# Altium PCB 0.2.PcbDoc
Units mil, origin at the board's own origin, x right, y up, seen from the top; angles counter-clockwise.
Board outline 6000 x 4000 mil, 2 copper layers (Top Layer, Bottom Layer); 14 components, 9 nets, 84 pads, 0 vias.
Unrouted connection lines stored in the file: 14.
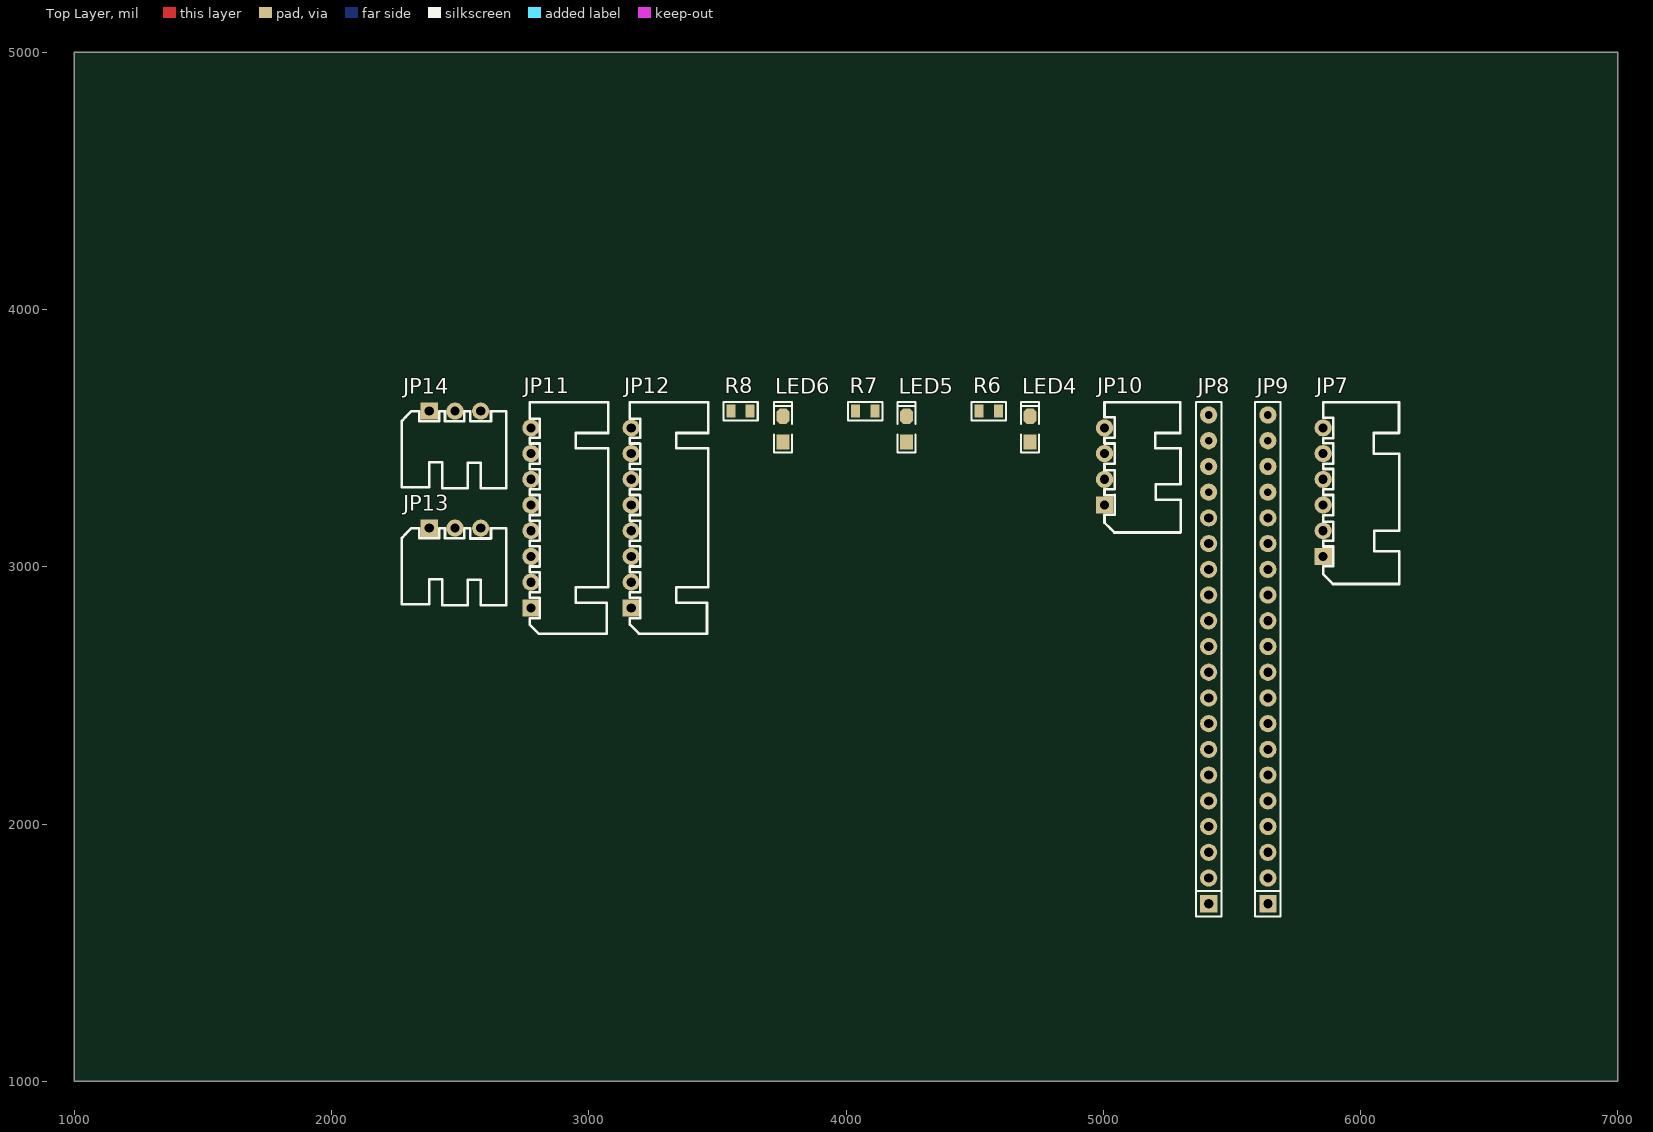
[diagram p0: Top Layer view]
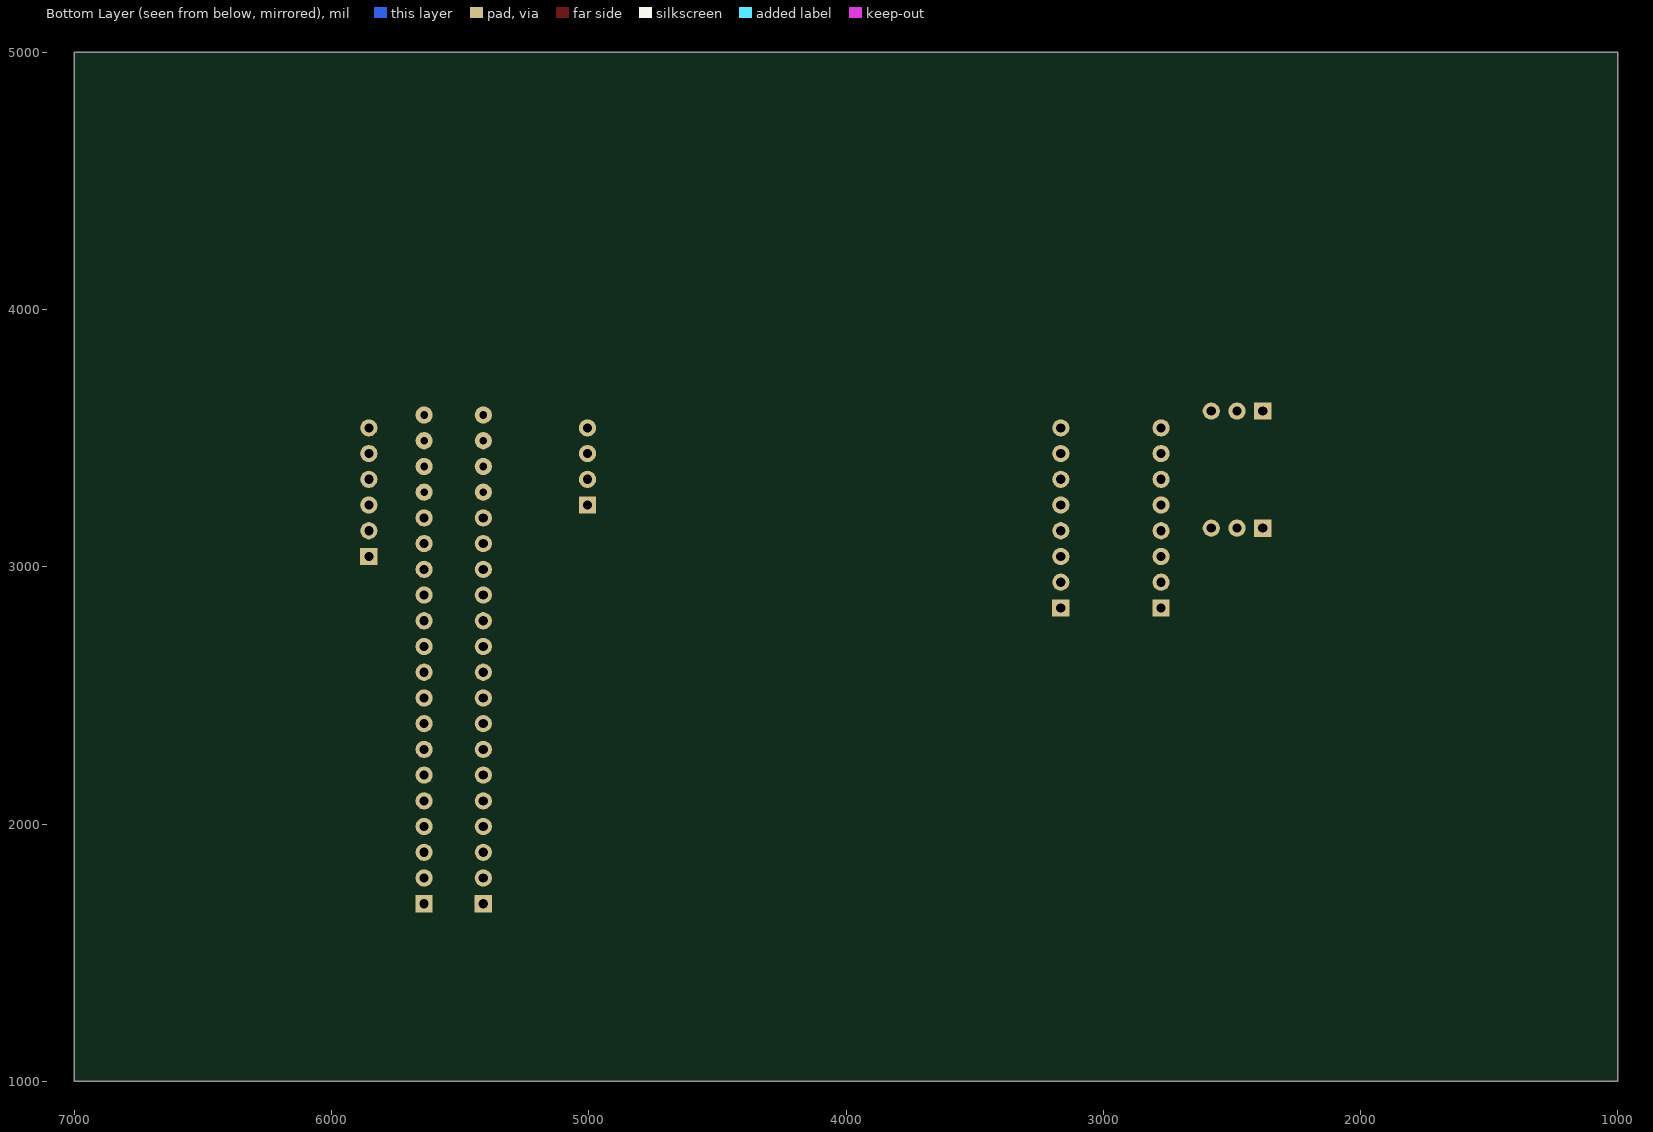
[diagram p1: Bottom Layer view, seen from below]

## Layer stack, top to bottom
Top Solder: solder mask 0.4, Solder Resist, Dk 3.5
Top Layer: signal copper 1.4
Dielectric 1: dielectric 12.6, FR-4, Dk 4.8
Bottom Layer: signal copper 1.4
Bottom Solder: solder mask 0.4, Solder Resist, Dk 3.5

## Board outline
1000,1000 7000,1000 7000,5000 1000,5000

## Design rules (kind name [scope] priority, off if disabled: settings)
Clearance [All] p1: gap=10 ignorepadtopadclearanceinfootprint=FALSE except(0: Arc-Hole Track-Hole SMDPad-Hole THPad-Hole Via-Hole Fill-Hole Poly-Hole Region-Hole Text-Hole)
PolygonConnect [All] p1: connectstyle=Relief reliefconductorwidth=10 reliefentries=4 polygonreliefangle="90 Angle" airgapwidth=10
RoomDefinition 0.2 [InComponentClass('0.2')] p1: confinementstyle=ConfineIn formatcopy=TRUE lockcomponents=FALSE outline 1795,1630 6165,1630 6165,3750 1795,3750
RoutingVias [All] p1: holewidth=28 width=50 viastyle="Through Hole" minholewidth=28 minwidth=50 maxholewidth=28 maxwidth=50
SolderMaskExpansion [All] p1: expansion=4 istentingtop=FALSE
Width [All] p1: maxlimit=10 minlimit=10 preferedwidth=10
30 further rules are at their usual default settings.

## Components (designator, comment, footprint, x,y, rotation, side; value= is the part's Value field where it differs from the comment)
JP7 "HDR-1X6" XH2.54-WI-6P 5855,3290 r90 top
JP8 "HDR-1X20" HDR2.54-LI-20P 5410,2640 r90 top
JP9 "HDR-1X20" HDR2.54-LI-20P 5640,2640 r90 top
JP10 "HDR-1X4" XH2.54-WI-4P 5005,3390 r90 top
JP11 "HDR-1X8" XH2.54-WI-8P 2775,3190 r90 top
JP12 "HDR-1X8" XH2.54-WI-8P 3165,3190 r90 top
JP13 "HDR-1X3" XH2.54-WI-3P 2480,3150 r0 top
JP14 "HDR-1X3" XH2.54-WI-3P 2480,3605 r0 top
LED4 "绿色" "LED 0805G" 4715,3535 r90 top
LED5 "红色" "LED 0805G" 4235,3535 r90 top
LED6 "红色" "LED 0805G" 3755,3535 r90 top
R6 "500K" "R 0805_L" 4555,3605 r0 top
R7 "500K" "R 0805_L" 4075,3605 r0 top
R8 "500K" "R 0805_L" 3590,3605 r0 top

## Footprints (in the part's own frame and the unit in brackets; to place one, negate y for a bottom-side part, rotate by r counter-clockwise, add the part's x,y. Pads: shape width x height; smd on the part's side, far side on the other; paste and mask are expansions set on the pad)
HDR2.54-LI-20P [mm] "排针，20脚"
  rect 1.7x1.7 hole 0.9: 1(-24.13,0)
  round 1.7 hole 0.9: 2(-21.59,0) 3(-19.05,0) 4(-16.51,0) 5(-13.97,0) 6(-11.43,0) 7(-8.89,0) 8(-6.35,0) 9(-3.81,0) 10(-1.27,0) 11(1.27,0) 12(3.81,0) 13(6.35,0) 14(8.89,0) 15(11.43,0) 16(13.97,0)
  round 1.7 hole 0.762: 17(16.51,0) 18(19.05,0) 19(21.59,0) 20(24.13,0)
  silkscreen extent -25.4,-1.27 25.4,1.27, body extent -25.4,-1.27 25.4,1.27, height 8.5
"LED 0805G" [mil] "绿色0805LED"
  rect 60x50 smd: 1(-50,0)
  oct 60x50 smd: 2(50,0)
  silkscreen extent -90,-35 105,35, body extent -39,-25 39,25, height 32
"R 0805_L" [mil] "1/8W贴片电阻"
  rect 35x50 smd: 1(-37.4,0) 2(37.4,0)
  silkscreen extent -67,-36 67,36, body extent -39,-25 39,25, height 20
XH2.54-WI-3P [mm] "接插件，3P"
  rect 1.7x1.7 hole 0.9: 1(-2.54,0)
  round 1.7 hole 0.9: 2(0,0) 3(2.54,0)
  silkscreen extent -5.26,-7.62 5.08,0, body extent -5.04,-7.35 5.04,0.35, height 5.73
XH2.54-WI-4P [mm] "接插件，4P"
  rect 1.7x1.7 hole 0.9: 1(-3.81,0)
  round 1.7 hole 0.9: 2(-1.27,0) 3(1.27,0) 4(3.81,0)
  silkscreen extent -6.53,-7.53 6.35,0, body extent -6.31,-7.35 6.31,0.35, height 5.73
XH2.54-WI-6P [mm] "接插件，6P"
  rect 1.7x1.7 hole 0.9: 1(-6.35,0)
  round 1.7 hole 0.9: 2(-3.81,0) 3(-1.27,0) 4(1.27,0) 5(3.81,0) 6(6.35,0)
  silkscreen extent -9.07,-7.53 8.89,0, body extent -8.85,-7.35 8.85,0.35, height 5.75
XH2.54-WI-8P [mm] "接插件，8P"
  rect 1.7x1.7 hole 0.9: 1(-8.89,0)
  round 1.7 hole 0.9: 2(-6.35,0) 3(-3.81,0) 4(-1.27,0) 5(1.27,0) 6(3.81,0) 7(6.35,0) 8(8.89,0)
  silkscreen extent -11.43,-7.62 11.43,0.13, body extent -11.39,-7.35 11.39,0.35, height 5.75

## Part data
JP7: library part "Header 6", "6P接插件", BOM名称=HB-03, 学习资源=https://shop463601444.taobao.com, 版权归属="封装库来自淘宝 ID：黄晶宝石"
JP8 JP9: library part "Header 20", "20P接插件", 学习资源=https://shop463601444.taobao.com, 版权归属="封装库来自淘宝 ID：黄晶宝石"
  JP8: BOM名称=stm32-1
  JP9: BOM名称=stm32-2
JP10: library part "Header 4", "4P接插件", BOM名称=USB-C, 学习资源=https://shop463601444.taobao.com, 版权归属="封装库来自淘宝 ID：黄晶宝石"
JP11 JP12: library part "Header 8", "8P接插件", 学习资源=https://shop463601444.taobao.com, 版权归属="封装库来自淘宝 ID：黄晶宝石"
  JP11: BOM名称=TB6612接插件1
  JP12: BOM名称=TB6612接插件2
JP13 JP14: library part "Header 3", "3P接插件", BOM名称=3P接插件, 学习资源=https://shop463601444.taobao.com, 版权归属="封装库来自淘宝 ID：黄晶宝石"
LED4 LED5 LED6: library part LED-SMD, "贴片LED", 学习资源=www.ooocke.com, 版权归属=源创客
  LED4: BOM名称=电源指示
  LED5 LED6: BOM名称=贴片LED
R6 R7 R8: library part R, "贴片电阻", BOM名称=贴片电阻, 版权归属="来自淘宝 ID：黄晶宝石", 联系售后=https://shop463601444.taobao.com

## Nets (pads, with @x,y where several pads share a name; then routed paths per layer and width w, separated by ;. In a path a pad name is that pad's centre, name@x,y a point inside that pad or via, vN(x,y) a via of type N, cw(c..) or ccw(c..) an arc to the next point about the centre after c; other vN are vias at no path point)
5V: JP7.5 JP7.6 JP8.1 JP10.1 LED4.1
A6: JP8.11
A7: JP8.12
BRX: JP7.2 JP9.6
BTX: JP7.3 JP9.7
GND: JP7.4 JP8.19 JP10.4 R6.2 R7.2 R8.2
NetLED4_2: LED4.2 R6.1
NetLED5_2: LED5.2 R7.1
NetLED6_2: LED6.2 R8.1
pads on no net: JP7.1 JP8.2 JP8.3 JP8.4 JP8.5 JP8.6 JP8.7 JP8.8 JP8.9 JP8.10 JP8.13 JP8.14 JP8.15 JP8.16 JP8.17 JP8.18 JP8.20 JP9.1 JP9.2 JP9.3 JP9.4 JP9.5 JP9.8 JP9.9 JP9.10 JP9.11 JP9.12 JP9.13 JP9.14 JP9.15 JP9.16 JP9.17 JP9.18 JP9.19 JP9.20 JP10.2 JP10.3 JP11.1 JP11.2 JP11.3 JP11.4 JP11.5 JP11.6 JP11.7 JP11.8 JP12.1 JP12.2 JP12.3 JP12.4 JP12.5 JP12.6 JP12.7 JP12.8 JP13.1 JP13.2 JP13.3 JP14.1 JP14.2 JP14.3 LED5.1 LED6.1